# Altium PCB PCB1.PcbDoc
Units mm, origin at the board's own origin, x right, y up, seen from the top; angles counter-clockwise.
Board outline 152.4 x 101.6 mm, 2 copper layers (Top Layer, Bottom Layer); 16 components, 21 nets, 70 pads, 0 vias.
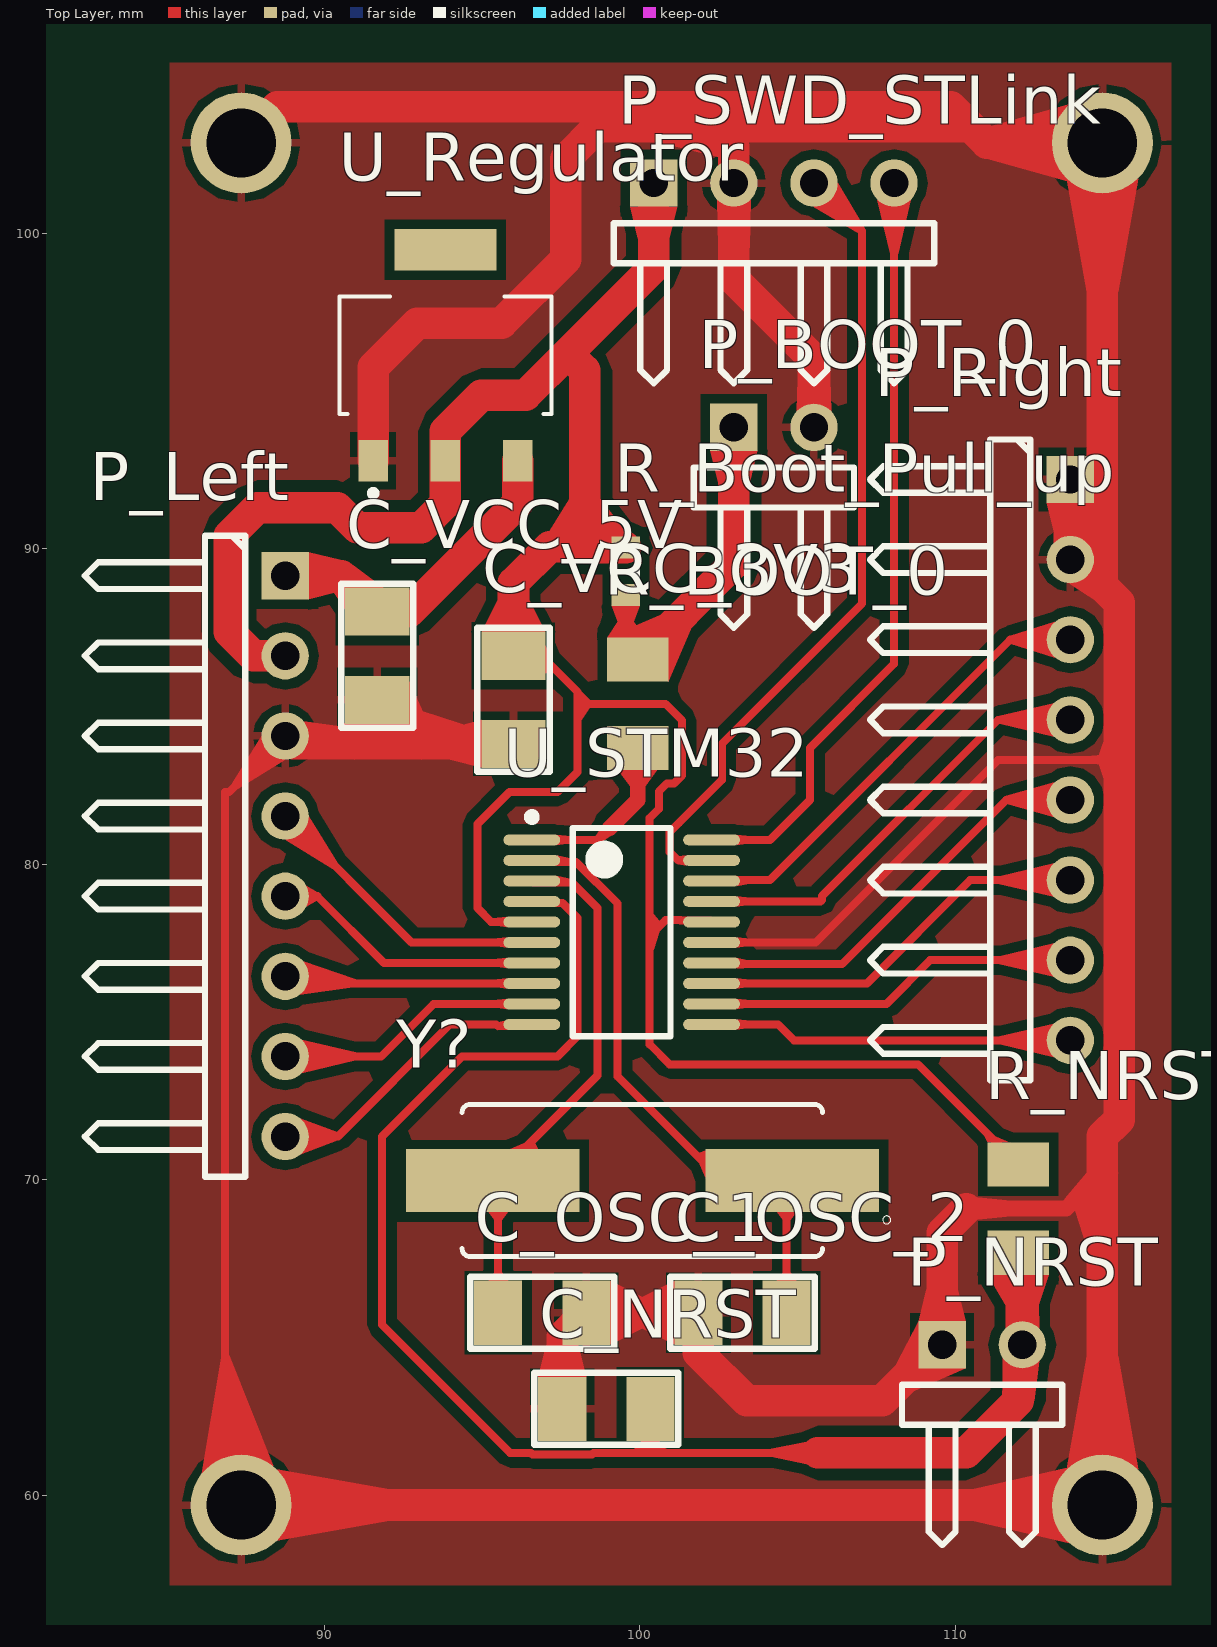
[diagram p0: Top Layer view]
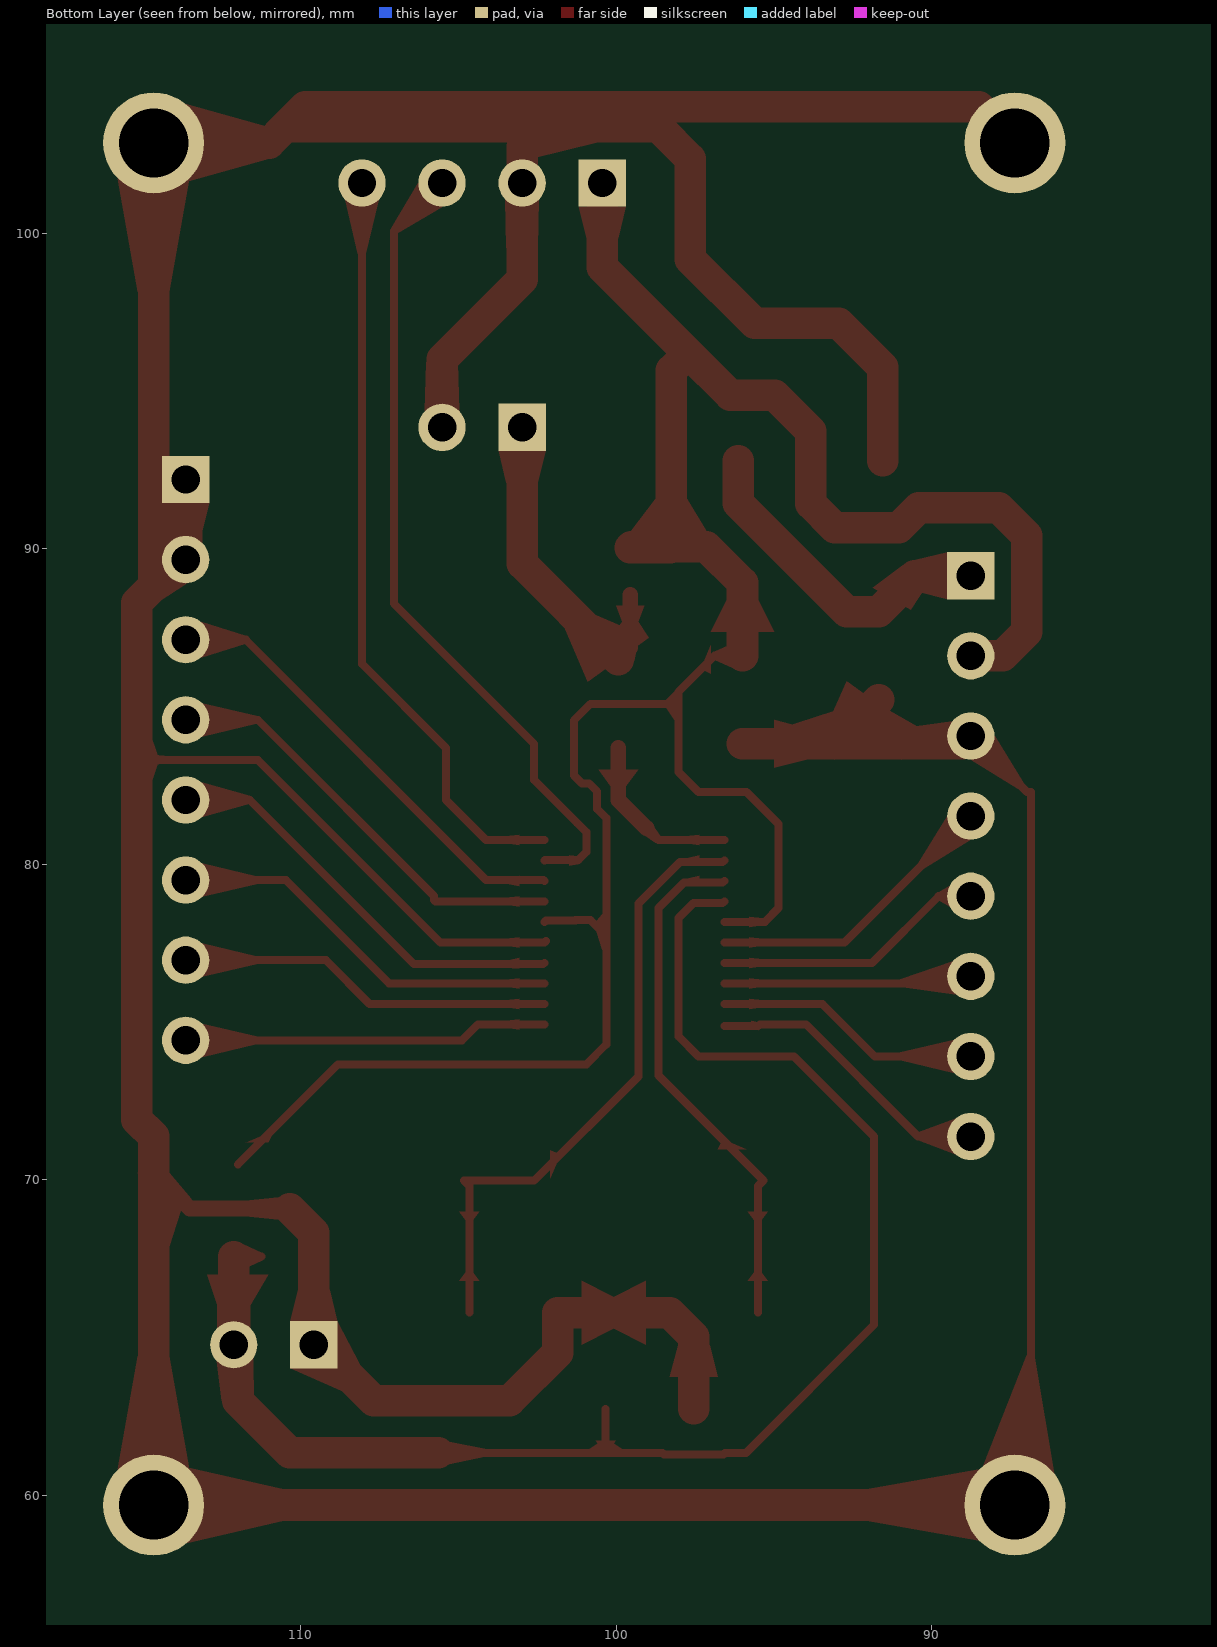
[diagram p1: Bottom Layer view, seen from below]

## Layer stack, top to bottom
Top Solder: solder mask 0.0102, Solder Resist, Dk 3.5
Top Layer: signal copper 0.0356
Dielectric 1: dielectric 0.32, FR-4, Dk 4.8
Bottom Layer: signal copper 0.0356
Bottom Solder: solder mask 0.0102, Solder Resist, Dk 3.5

## Board outline
25.4,25.4 177.8,25.4 177.8,127 25.4,127

## Design rules (kind name [scope] priority, off if disabled: settings)
Clearance [All] p1: gap=0.3 ignorepadtopadclearanceinfootprint=FALSE
PolygonConnect [All] p1: connectstyle=Relief reliefconductorwidth=0.254 reliefentries=4 polygonreliefangle="90 Angle" airgapwidth=0.254
RoutingVias [All] p1: holewidth=0.711 width=1.27 viastyle="Through Hole" minholewidth=0.711 minwidth=1.27 maxholewidth=0.711 maxwidth=1.27
SolderMaskExpansion [All] p1: expansion=0.102
Width [All] p1: maxlimit=1 minlimit=0.254 preferedwidth=0.5
30 further rules are at their usual default settings.

## Classes and differential pairs
component class Sheet1: C_NRST C_OSC_1 C_OSC_2 C_VCC_3V3 C_VCC_5V P_BOOT_0 P_Left P_NRST P_Right P_SWD_STLink R_BOOT_0 R_Boot_Pull_up R_NRST U_Regulator U_STM32

## Components (designator, comment, footprint, x,y, rotation, side; value= is the part's Value field where it differs from the comment)
C_NRST "33pF" SMD-1206C 98.933,62.738 r270 top
C_OSC_1 "18pF" SMD-1206C 96.901,65.786 r90 top
C_OSC_2 "18pF" SMD-1206C 103.251,65.786 r270 top
C_VCC_3V3 "33pF" SMD-1206C 95.991,85.217 r0 top
C_VCC_5V "33pF" SMD-1206C 91.673,86.614 r0 top
P_BOOT_0 "Header 2H" HDR1X2H 102.976,93.853 r0 top (schematic designator P_Boot_0)
P_Left "Header 8H" HDR1X8H 88.752,89.151 r270 top
P_NRST "Header 2H" HDR1X2H 109.58,64.77 r0 top
P_Right "Header 8H" HDR1X8H 113.644,92.202 r270 top
P_SWD_STLink "Header 4H" HDR1X4H 100.436,101.6 r0 top
R_BOOT_0 "CRCW12061K00FKEA" RESC3216X65 99.928,85.09 r270 top value=10K
R_Boot_Pull_up "Res3" J1-0603 99.547,89.293 r270 top value=10K
R_NRST "CRCW12061K00FKEA" RESC3216X65 111.993,69.088 r90 top
U_Regulator "AMS1117-3.3" SOT229P700X180-4N 93.832,96.139 r0 top
U_STM32 "STM32F030F4P6" STM-TSSOP20_N 99.42,77.851 r0 top
Y? "FOXSDLF/115-20" XTAL1170X500X450 100.076,69.977 r180 top

## Footprints (in the part's own frame and the unit in brackets; to place one, negate y for a bottom-side part, rotate by r counter-clockwise, add the part's x,y. Pads: shape width x height; smd on the part's side, far side on the other; paste and mask are expansions set on the pad)
HDR1X2H [mm] "Connector; Header; 2 Position; Right Angle"
  rect 1.5x1.5 hole 0.9: 1(0,0)
  round 1.5 hole 0.9: 2(2.54,0)
  silkscreen extent -1.27,-6.35 3.81,-1.27
HDR1X4H [mm] "Connector; Header; 4 Position; Right Angle"
  rect 1.5x1.5 hole 0.9: 1(0,0)
  round 1.5 hole 0.9: 2(2.54,0) 3(5.08,0) 4(7.62,0)
  silkscreen extent -1.27,-6.35 8.89,-1.27
HDR1X8H [mm] "Connector; Header; 8 Position; Right Angle"
  rect 1.5x1.5 hole 0.9: 1(0,0)
  round 1.5 hole 0.9: 2(2.54,0) 3(5.08,0) 4(7.62,0) 5(10.16,0) 6(12.7,0) 7(15.24,0) 8(17.78,0)
  silkscreen extent -1.27,-6.35 19.05,-1.27
J1-0603 [mm] "Chip Resistor, Body 1.6x0.8mm, IPC High Density"
  rect 0.7x0.9 smd: 1(-0.75,0) 2(0.75,0)
  silkscreen extent -0.2,-0.35 0.2,0.35, body extent -0.85,-0.48 0.85,0.48, height 0.9
RESC3216X65 [mm]
  rect 1.4x1.95 smd: 1(-1.4,0) 2(1.4,0)
SMD-1206C [mil]
  rect 80x60 smd: 1(0,55) 2(0,-55)
  silkscreen extent -45,-90 45,90, body extent -31,-63 32,63, height 39
SOT229P700X180-4N [mm]
  rect 0.93x1.31 smd: 1(-2.29,-3.345) 2(0,-3.345) 3(2.29,-3.345)
  rect 3.24x1.31 smd: 4(0,3.345)
  silkscreen extent -3.36,-4.47 3.36,1.86
STM-TSSOP20_N [mm] "SOP, 20-Leads, Body 6.6x4.5mm, Pitch 0.65mm, IPC Medium Density"
  oval 1.8x0.35 smd: 1(-2.85,2.925) 2(-2.85,2.275) 3(-2.85,1.625) 4(-2.85,0.975) 5(-2.85,0.325) 6(-2.85,-0.325) 7(-2.85,-0.975) 8(-2.85,-1.625) 9(-2.85,-2.275) 10(-2.85,-2.925) 11(2.85,-2.925) 12(2.85,-2.275) 13(2.85,-1.625) 14(2.85,-0.975) 15(2.85,-0.325) 16(2.85,0.325) 17(2.85,0.975) 18(2.85,1.625) 19(2.85,2.275) 20(2.85,2.925)
  silkscreen extent -2.97,-3.3 1.55,3.77, body extent -2.25,-3.3 2.25,3.3, height 1.2
XTAL1170X500X450 [mm]
  rect 5.5x2 smd: 1(-4.75,0) 2(4.75,0)
  silkscreen extent -7.88,-2.41 5.71,2.41

## Part data
C_NRST C_OSC_1 C_OSC_2 C_VCC_3V3 C_VCC_5V: library part GC331AD72E333KX01D, "CAP CER 0.033UF 250V X7T 1206", Digi-Key Part Number=490-13989-1-ND, Manufacturer="Murata Electronics North America", Operating Temperature="-55°C ~ 125°C", Package / Case="1206 (3216 Metric)", Ratings=AEC-Q200, Temperature Coefficient=X7T, Tolerance=±10%, Voltage=250V, @ qty=0, Applications=Automotive, Datasheets=http://search.murata.co.jp/Ceramy/image/img/A01X/G101/ENG/GC331AD72E333KX01-01.pdf, Factory Stock=0, Features=-, Height - Seated (Max)=-, Image=//media.digikey.com/Renders/Murata%20Renders/1206(GC3)320x160.jpg, Lead Spacing=-, Lead Style=-, Minimum Quantity=1, Mounting Type="Surface Mount, MLCC", Packaging="Cut Tape (CT)", Part Number=GC331AD72E333KX01D, Part Status=Active, Quantity Available=3999, Series=GC3, Size / Dimension="0.126\" L x 0.063\" W (3.20mm x 1.60mm)", Thickness (Max)="0.039\" (1.00mm)", Unit Price (USD)=0.33
P_BOOT_0 P_NRST: "Header, 2-Pin, Right Angle", LatestRevisionDate=17-Jul-2002, LatestRevisionNote="Re-released for DXP Platform.", Publisher="Altium Limited"
P_Left P_Right: "Header, 8-Pin, Right Angle", LatestRevisionDate=17-Jul-2002, LatestRevisionNote="Re-released for DXP Platform.", Publisher="Altium Limited"
P_SWD_STLink: "Header, 4-Pin, Right Angle", LatestRevisionDate=17-Jul-2002, LatestRevisionNote="Re-released for DXP Platform.", Publisher="Altium Limited"
R_BOOT_0 R_NRST: "Res Thick Film 1206 1K Ohm 1% 0.25W_1/4W_ Â±100ppm/C Molded SMD Automotive Paper T/R", Package="1206 Vishay", Availability=Good, MF=Vishay, MP=CRCW12061K00FKEA, Price="0.03 USD", SnapEDA_Link=https://www.snapeda.com/parts/CRCW12061K00FKEA/Vishay%20Dale/view-part/?ref=snap
R_Boot_Pull_up: "Resistor", LatestRevisionDate=29-May-2009, LatestRevisionNote="IPC-7351 Footprint Added.", PackageDescription="Chip Resistor", PackageReference=J1-0603, Published=8-Jun-2000, Publisher="Altium Limited"
U_Regulator: "Sot223/Pkg 1-Amp 3.3-Volt Low Drop Out Voltage Regulatator", Package=None, Availability=Unavailable, MF="Advanced Monolithic Systems", MP=AMS1117-3.3, Price=None, SnapEDA_Link=https://www.snapeda.com/parts/AMS1117-3.3/Advanced%20Monolithic%20Systems/view-part/?ref=snap
U_STM32: "ARM Cortex-M0 32-bit MCU, 16 KB Flash, 4 KB Internal RAM, 15 I/Os, 20-pin TSSOP, -40 to 85 degC, Tube", I/Os (High Current)=15, Operating Frequency(F) (Processor speed) (MHz)=48, Supplier Part Number 1=497-14044-5-ND, Supply Voltage(Vcc) min (V)=2.4, ComponentLink1Description="Manufacturer URL", ComponentLink1URL=http://www.st.com/web/en/home.html, ComponentLink2Description=Datasheet, ComponentLink2URL=http://www.st.com/st-web-ui/static/active/en/resource/technical/document/datasheet/DM00088500.pdf, ComponentLink3Description="Package Specification", ComponentLink3URL=http://www.st.com/st-web-ui/static/active/en/resource/technical/document/datasheet/DM00065136.pdf, Core="ARM Cortex-M0", DatasheetVersion="Rev. 1", FLASH Size (Prog) (kB)=16, Internal RAM Size (kB)=4, Mounting Technology="Surface Mount", PackageDescription="20-Pin Thin Shrink Small Outline Package, 6.5 x 4.4 mm Body, 0.65 mm Pitch", PackageReference=TSSOP20, PackageVersion="Rev. 1, 11/2012", Packing=Tube, PartNumber=STM32F030F4P6, Supplier 1=Digi-Key, Supplier 2=Newark, Supplier 3=Mouser, Supplier Part Number 2=06X3648, Supplier Part Number 3=511-STM32F030F4P6
Y?: "Crystal 11.0592MHz ?30ppm _Tol_ ?50ppm _Stability_ 20pF FUND 60Ohm 2-Pin HC-49/SDLF SMD T/R", Package="HC49SD Fox Electronics", Availability=Good, MF="Fox Electronics", MP=FOXSDLF/115-20, Price="0.34 USD", SnapEDA_Link=https://www.snapeda.com/parts/FOXSDLF/115-20/Fox%20Electronics/view-part/?ref=snap

## Free pads (board coordinates)
  round 3.2 hole 2.2: 2(87.355,102.87) 3(87.355,59.69) 4(114.66,59.69) 5(114.66,102.87)

## Nets (pads, with @x,y where several pads share a name; then routed paths per layer and width w, separated by ;. In a path a pad name is that pad's centre, name@x,y a point inside that pad or via, vN(x,y) a via of type N, cw(c..) or ccw(c..) an arc to the next point about the centre after c; other vN are vias at no path point)
BOOT_0: R_BOOT_0.2 U_STM32.1 | length 5.5
  Top Layer w0.254: U_STM32.1 98.662,80.776 99.039,81.153
  Top Layer w0.5: 99.039,81.153 99.928,82.042 R_BOOT_0.2
GND: C_NRST.2 C_OSC_1.2 C_OSC_2.2 C_VCC_3V3.2 C_VCC_5V.2 P_BOOT_0.2 P_Left.3 P_NRST.1 P_Right.1 P_Right.2 P_SWD_STLink.2 pad.2 pad.3 pad.4 pad.5 U_Regulator.1 U_STM32.15 | length 232.6
  Top Layer w0.254: pad.3 86.847,60.198 86.847,82.296 86.977,82.296 P_Left.3 P_Left.3@88.749,84.074 ; U_STM32.15@102.222,77.574 U_STM32.15 105.572,77.526 111.358,83.312 115.041,83.312
  Top Layer w0.5: 110.342,69.088 113.517,69.088 114.66,70.231 ; P_Right.2 115.041,88.265 115.041,83.312 115.041,73.78
  Top Layer w1: pad.3 110.41,59.69 ; pad.2 88.498,104.013 109.855,104.013 110.49,103.378 ; P_Left.3 89.003,83.82 93.07,83.82 ; U_Regulator.1 91.542,95.754 92.943,97.155 95.61,97.155 97.642,99.187 97.642,102.362 98.658,103.378 102.341,103.378 ; C_VCC_5V.2 93.07,83.82 ; C_VCC_3V3.2 93.07,83.82 ; C_NRST.2 97.536,65.024 C_OSC_1.2 C_OSC_2.2 101.854,64.516 103.378,62.992 107.675,62.992 109.453,64.77 P_NRST.1 109.58,68.326 110.342,69.088 ; P_BOOT_0.2 105.516,96.012 102.976,98.552 P_SWD_STLink.2 102.976,102.743 102.341,103.378 ; 110.529,59.69 pad.4 114.66,70.231 114.66,71.374 115.194,71.908 115.194,88.298 114.66,88.832 114.66,92.202 pad.5 110.998,102.87 110.49,103.378 ; P_Right.2 P_Right.1 ; 102.341,103.378 110.49,103.378
NetP_Boot_0_1: P_BOOT_0.1 R_BOOT_0.1 R_Boot_Pull_up.2 | length 10.8
  Top Layer w0.5: R_Boot_Pull_up.2 99.547,86.871 R_BOOT_0.1
  Top Layer w1: R_BOOT_0.1 102.976,89.538 P_BOOT_0.1
NRST: C_NRST.1 P_NRST.2 R_NRST.1 U_STM32.4 | length 48.4
  Top Layer w0.254: U_STM32.4 96.618,78.778 97.544,78.778 98.023,78.299 98.023,74.549 97.388,73.914 94.361,73.914 91.821,71.374 91.821,65.405 95.885,61.341 96.551,61.341 96.597,61.295 98.475,61.295 98.521,61.341 100.33,61.341 ; C_NRST.1 100.33,61.341 ; 105.643,61.341 100.33,61.341 ; R_NRST.1@111.234,67.561 R_NRST.1@112.12,67.561
  Top Layer w1: 105.643,61.341 110.342,61.341 111.993,62.992 111.993,64.643 P_NRST.2 R_NRST.1@112.12,67.561
OSC_1: C_OSC_2.1 U_STM32.2 Y?.1 | length 19.9
  Top Layer w0.254: U_STM32.2 96.618,80.078 97.976,80.078 99.293,78.761 99.293,73.279 102.595,69.977 Y?.1 104.648,69.799 C_OSC_2.1
OSC_2: C_OSC_1.1 U_STM32.3 Y?.2 | length 16.7
  Top Layer w0.254: C_OSC_1.1 95.504,69.799 Y?.2 98.658,73.309 98.658,78.613 97.843,79.428 96.618,79.428 U_STM32.3
PA_0: P_Left.4 U_STM32.6 | length 9.5
  Top Layer w0.254: P_Left.4 92.757,77.526 U_STM32.6
PA_1: P_Left.5 U_STM32.7 | length 8.7
  Top Layer w0.254: P_Left.5 89.771,78.991 91.886,76.876 U_STM32.7
PA_2: P_Left.6 U_STM32.8 | length 7.9
  Top Layer w0.254: P_Left.6 88.977,76.226 U_STM32.8
PA_3: P_Left.7 U_STM32.9 | length 8.5
  Top Layer w0.254: P_Left.7 91.797,73.911 93.462,75.576 U_STM32.9
PA_4: P_Left.8 U_STM32.10 | length 9.3
  Top Layer w0.254: P_Left.8 88.755,71.374 90.424,71.374 93.98,74.93 95.442,74.93 95.498,74.874 U_STM32.10@96.57,74.874
PA_5: P_Right.8 U_STM32.11 | length 11.6
  Top Layer w0.254: U_STM32.11 102.274,74.93 104.373,74.93 104.881,74.422 P_Right.8
PA_6: P_Right.7 U_STM32.12 | length 11.9
  Top Layer w0.254: U_STM32.12 107.813,75.576 109.199,76.962 P_Right.7
PA_7: P_Right.6 U_STM32.13 | length 12.7
  Top Layer w0.254: U_STM32.13 107.193,76.226 110.469,79.502 P_Right.6
PA_9: P_Right.4 U_STM32.17 | length 13.8
  Top Layer w0.254: U_STM32.17 105.729,78.826 105.77,78.867 105.77,78.994 111.358,84.582 P_Right.4
PA_10: P_Right.3 U_STM32.18 | length 14.5
  Top Layer w0.254: U_STM32.18 102.296,79.502 104.119,79.502 111.739,87.122 P_Right.3
PA_13: P_SWD_STLink.3 U_STM32.19 | length 25.8
  Top Layer w0.254: U_STM32.19 102.259,80.137 101.198,80.137 100.943,80.392 100.943,81.025 101.232,81.315 102.595,82.677 102.595,83.82 107.04,88.265 107.04,100.076 P_SWD_STLink.3
PA_14: P_SWD_STLink.4 U_STM32.20 | length 24.3
  Top Layer w0.254: U_STM32.20 104.123,80.776 105.389,82.042 105.389,83.693 108.056,86.36 P_SWD_STLink.4
PB_1: P_Right.5 U_STM32.14 | length 13.5
  Top Layer w0.254: U_STM32.14 102.311,76.835 106.405,76.835 111.612,82.042 P_Right.5
VCC_3V3: C_VCC_3V3.1 P_Left.2 P_SWD_STLink.1 R_Boot_Pull_up.1 R_NRST.2 U_Regulator.2 U_STM32.5 U_STM32.16 | length 84
  Top Layer w0.254: P_Left.2 P_Left.2@88.755,86.614 ; C_VCC_3V3.1 96.88,86.614 98.023,85.471 98.023,85.09 ; U_STM32.5 95.285,78.176 94.848,78.613 94.848,81.28 95.864,82.296 97.388,82.296 98.023,82.931 98.023,85.09 ; U_STM32.16 102.222,78.224 101.287,78.224 101.287,78.232 100.817,78.232 100.309,77.724 ; R_NRST.2 108.821,73.66 100.944,73.66 100.309,74.295 100.309,77.724 ; 98.023,85.09 100.806,85.09 101.33,84.567 101.33,82.813 101.079,82.563 100.851,82.563 100.605,82.316 100.605,81.762 100.309,81.466 100.309,77.724
  Top Layer w1: P_Left.2 87.739,86.611 86.974,87.376 86.974,90.424 87.863,91.313 90.403,91.313 91.038,90.678 93.07,90.678 93.832,91.44 U_Regulator.2 93.832,93.726 94.975,94.869 96.372,94.869 97.705,96.203 ; C_VCC_3V3.1 95.991,88.926 97.134,90.069 98.251,90.069 ; P_SWD_STLink.1 100.436,98.933 97.705,96.203 ; 97.705,96.203 98.251,95.657 98.251,90.069 ; 98.251,90.069 99.521,90.069 R_Boot_Pull_up.1 98.277,90.043 98.251,90.069
VCC_5V: C_VCC_5V.1 P_Left.1 U_Regulator.3 | length 10.6
  Top Layer w1: P_Left.1 90.533,89.151 C_VCC_5V.1 92.689,88.011 96.122,91.444 U_Regulator.3
pads on no net: U_Regulator.4

## Polygon pours and split planes (outlines as drawn)
GND on Top Layer "Top Layer-No Net" (solid, pour order 12): 116.84,57.15 85.09,57.15 85.09,105.41 116.84,105.41